# Altium PCB SD171-6.0PCB4.PcbDoc (part 9 of 11)
Units mil, origin at the board's own origin, x right, y up, seen from the top; angles counter-clockwise.
Board outline 5995 x 3921.26 mil, 6 copper layers (Top Layer, GND, Mid-Layer 1, Mid-Layer 2, VCC, Bottom Layer); 477 components, 539 nets, 2143 pads, 1050 vias.
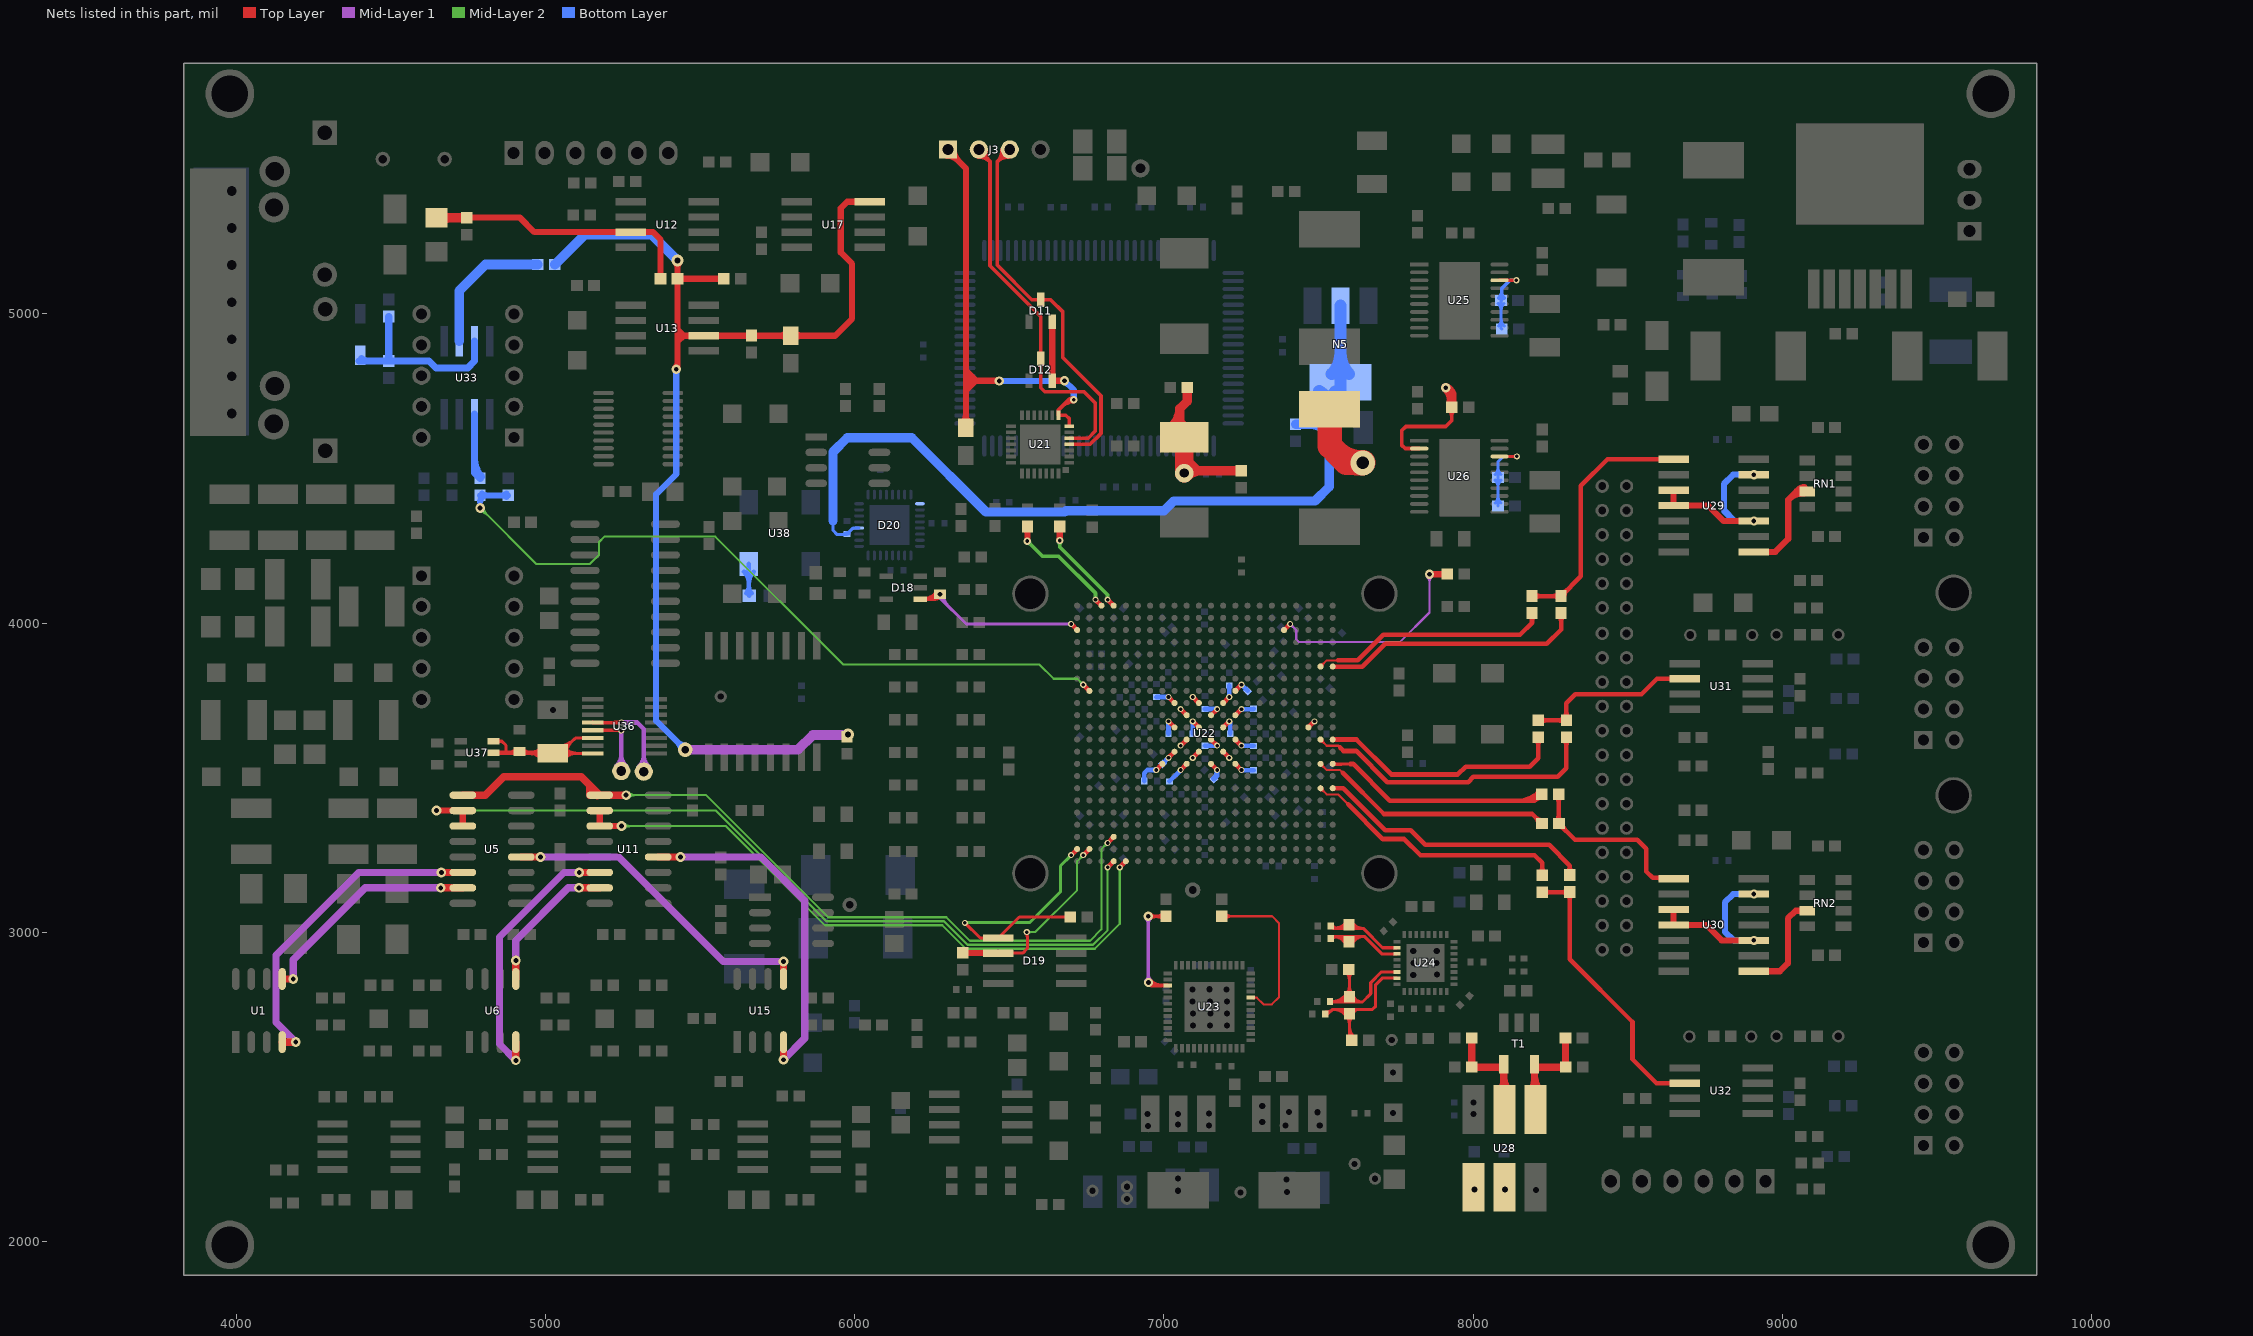
[diagram p13: the nets of this part, all layers, seen from the top]

## Via types
v1: diameter 19.68, hole 11.81, Top Layer to Bottom Layer, 521 vias
v2: diameter 50, hole 25, Top Layer to Bottom Layer, 162 vias
v3: diameter 30, hole 15, Top Layer to Bottom Layer, 100 vias
v4: diameter 39.37, hole 19.68, Top Layer to Bottom Layer, 74 vias
v5: diameter 31.5, hole 15.75, Top Layer to Bottom Layer, 44 vias
v6: diameter 40, hole 20, Top Layer to Bottom Layer, 38 vias
v7: diameter 24, hole 12, Top Layer to Bottom Layer, 33 vias
v8: diameter 47.24, hole 23.62, Top Layer to Bottom Layer, 24 vias
v9: diameter 59.06, hole 31.5, Top Layer to Bottom Layer, 10 vias
v10: diameter 60, hole 30, Top Layer to Bottom Layer, 9 vias
v11: diameter 25.98, hole 12.99, Top Layer to Bottom Layer, tented top, 9 vias
v12: diameter 23.62, hole 11.81, Top Layer to Bottom Layer, 8 vias
v13: diameter 20, hole 12, Top Layer to Bottom Layer, 6 vias
v14: diameter 50, hole 27.56, Top Layer to Bottom Layer, 4 vias
v15: diameter 51.18, hole 27.56, Top Layer to Bottom Layer, 2 vias
v16: diameter 39.37, hole 23.62, Top Layer to Bottom Layer, 2 vias
v17: diameter 80, hole 40, Top Layer to Bottom Layer, 1 vias
v18: diameter 47.24, hole 19.68, Top Layer to Bottom Layer, 1 vias
v19: diameter 47.24, hole 27.56, Top Layer to Bottom Layer, 1 vias
v20: diameter 22.05, hole 11.81, Top Layer to Bottom Layer, 1 vias

## Nets (pads, with @x,y where several pads share a name; then routed paths per layer and width w, separated by ;. In a path a pad name is that pad's centre, name@x,y a point inside that pad or via, vN(x,y) a via of type N, cw(c..) or ccw(c..) an arc to the next point about the centre after c; other vN are vias at no path point) (continued)
NetR94_1: R94.1 U22.E3 | length 1006.1
  Top Layer w15: U22.E3@7388.52,3977.26 v1(7408.21,3996.95)
  Top Layer w20: v3(7859,4158) R94.1@7917,4158 ; 7896.69,4158 ccw(c7896.69,4177.31) 7910.34,4163.66 cw(c7896.69,4177.31) 7896.69,4158 ; 7896.69,4158 cw(c7896.69,4138.69) 7910.34,4152.34 ccw(c7896.69,4138.69) 7896.69,4158
  Mid-Layer 1 w7: v1(7408.21,3996.95) 7428,3977.15 7428,3947 7437,3938 7763,3938 7859,4034 v3(7859,4158) ; v1@7408.21,3990.6 cw(c7408.21,3975.29) 7419.03,3986.12 ; v1@7408.21,3990.6 cw(c7408.21,3975.29) 7419.03,3986.12 ; v1@7408.21,3990.6 cw(c7408.21,3975.29) 7419.03,3986.12 ; v1@7414.55,3996.95 ccw(c7429.86,3996.95) 7419.03,3986.12 ; v1@7414.55,3996.95 ccw(c7429.86,3996.95) 7419.03,3986.12 ; v1@7414.55,3996.95 ccw(c7429.86,3996.95) 7419.03,3986.12 ; v3@7850.87,4149.87 cw(c7831.24,4130.24) 7859,4130.24 ; v3@7850.87,4149.87 cw(c7831.24,4130.24) 7859,4130.24 ; v3@7850.87,4149.87 cw(c7831.24,4130.24) 7859,4130.24 ; 7859,4130.24 cw(c7886.76,4130.24) v3@7867.13,4149.87 ; 7859,4130.24 cw(c7886.76,4130.24) v3@7867.13,4149.87 ; 7859,4130.24 cw(c7886.76,4130.24) v3@7867.13,4149.87
NetR96_2: R96.2 U22.A6 | length 882.4
  Top Layer w15: U22.A6@7546,3859.15 7547.15,3858 7641,3858 7716,3933 8239,3933 8285,3979 R96.2@8285,4032 ; R96.2@8277.58,4023.58 cw(c8259.65,4005.65) 8285,4005.65 cw(c8310.35,4005.65) R96.2@8292.42,4023.58
NetR97_2: R97.2 U22.A12 | length 840.5
  Top Layer w15: U22.A12@7546,3622.93 7623.07,3622.93 7736,3510 7951,3510 7976,3535 8183,3535 8211,3563 R97.2@8211,3630 ; R97.2@8203.58,3621.58 cw(c8185.65,3603.65) 8211,3603.65 cw(c8236.35,3603.65) R97.2@8218.42,3621.58
NetR98_2: R98.2 U22.A14 | length 912
  Top Layer w10: U22.A14@7546,3544.19 7547.16,3543.03 7574.32,3543.03 7575.48,3544.19 7602.81,3544.19 7603,3544 ; U22.A14@7549.42,3547.61 ccw(c7560.48,3558.67) 7560.48,3543.03
  Top Layer w15: 7603,3544 7612,3544 7731,3425 8199,3425 8221,3447 R98.2@8222,3446 ; 8144.95,3425 ccw(c8144.95,3522.05) R98.2@8213.58,3453.42 ; 8181.17,3425 ccw(c8181.17,3485.83) R98.2@8224.18,3442.82 ; 8201.37,3427.37 cw(c8221,3407.74) R98.2@8221,3435.5 ; R98.2@8203.78,3429.78 ccw(c8187.56,3446) R98.2@8210.5,3446
NetR99_2: R99.2 U22.A16 | length 940.6
  Top Layer w15: U22.A16@7546,3465.45 7580.55,3465.45 7716,3330 7798,3330 7824,3304 7846,3282 8246,3282 8313,3215 R99.2@8313,3185 ; R99.2@8305.58,3193.42 ccw(c8287.65,3211.35) 8313,3211.35 ccw(c8338.35,3211.35) R99.2@8320.42,3193.42
NetR101_2: R101.2 R103.1 T1.5 U28.5 | length 457.9
  Top Layer w23.62: R101.2@7996,2657 R103.1@7996,2563 8095,2563 T1.5@8099,2559 ; 8076.43,2563 cw(c8076.43,2534.28) T1.5@8096.75,2554.59 ; U28.5@8085.3,2485.99 ccw(c8052.21,2519.08) 8099,2519.08 ; 8099,2533.56 ccw(c8166.27,2533.56) U28.5@8118.7,2485.99 ; T1.5@8099,2571.84 T1.5@8099,2559 ; U28.5@8102,2425.98 8099,2428.98 T1.5@8099,2559
NetR102_1: R102.1 R104.2 T1.4 U28.4 | length 455.9
  Top Layer w23.62: U28.4@8185.3,2485.99 ccw(c8152.21,2519.08) 8199,2519.08 ; 8199,2533.56 ccw(c8266.27,2533.56) U28.4@8218.7,2485.99 ; T1.4@8199,2571.84 T1.4@8199,2560 ; T1.4@8201.25,2554.59 cw(c8221.57,2534.28) 8221.57,2563 ; U28.4@8202,2425.98 8199,2428.98 T1.4@8199,2560 ; R104.2@8299,2657 8299,2564 R102.1@8300,2563 8202,2563 T1.4@8199,2560
NetR105_1: pad.0@8005,2167 R105.1 U28.1 | length 133.1
  Bottom Layer w19.68: pad.0@7998.04,2173.96 ccw(c7983.65,2188.35) 8004,2188.35 ; R105.1@7998.23,2227.25 cw(c7984.31,2213.32) 8004,2213.32 cw(c8023.69,2213.32) R105.1@8009.77,2227.25 ; pad.0@8002,2170 8004,2172 R105.1@8004,2234.02 ; 8004,2193.18 ccw(c8031.18,2193.18) pad.0@8011.96,2173.96
NetR115_2: R115.2 R116.1 U33.3 Z1.2 | length 619.3
  Bottom Layer w23.62: Z1.2@4395.93,4848 R116.1@4492,4848 ; Z1.2@4403.48,4854.79 ccw(c4419.87,4871.17) 4419.87,4848 ; R115.2@4492,4992 R116.1@4492,4848 ; U33.3@4769.43,4912.22 4769.43,4847.43 4747,4825 4645,4825 4622,4848 R116.1@4492,4848
NetR118_1: R118.1 U33.6 | length 336.2
  Bottom Layer w23.62: U33.6@4769.43,4676 4769.43,4486.12 R118.1@4787.55,4468 ; 4769.43,4527.69 ccw(c4846.24,4527.69) 4791.92,4473.38 cw(c4846.24,4527.69) 4769.43,4527.69
NetR120_2: R120.2 U33.2 | length 451.9
  Bottom Layer w31.5: U33.2@4720.21,4912.22 4720.21,5075.21 4805,5160 R120.2@4974,5160
NetR121_2: R121.2 U23.44 | length 638
  Top Layer w7: R121.2@7187,3051 7350,3051 7372,3029 7372,2789 7349,2766 7322,2766 7300.2,2787.8 U23.44@7280.71,2787.8 ; R121.2@7192.3,3045.7 cw(c7205.11,3032.89) 7205.11,3051 cw(c7205.11,3069.11) R121.2@7192.3,3056.3 ; R121.2@7197.25,3040.75 cw(c7222.01,3015.99) 7222.01,3051 cw(c7222.01,3086.01) R121.2@7197.25,3061.25 ; U23.44@7290.54,2785.82 cw(c7295.32,2781.04) 7295.32,2787.8 cw(c7295.32,2794.56) U23.44@7290.54,2789.78
NetR132_2: R132.2 U22.B6 | length 838
  Top Layer w7: U22.B6@7506.63,3859.15 7526.48,3879 7563,3879 ; U22.B6@7506.63,3865.49 ccw(c7506.63,3880.8) 7517.46,3869.98 ccw(c7528.28,3859.15) U22.B6@7512.97,3859.15
  Top Layer w15: 7563,3879 7627,3879 7710,3962 8152,3962 8191,4001 R132.2@8191,4032 ; R132.2@8183.58,4023.58 cw(c8165.65,4005.65) 8191,4005.65 cw(c8216.35,4005.65) R132.2@8198.42,4023.58
NetR133_2: R133.2 U22.B12 | length 1035
  Top Layer w7: U22.B12@7506.63,3616.59 cw(c7506.63,3601.28) 7517.46,3612.1 cw(c7528.28,3622.93) U22.B12@7512.97,3622.93 ; U22.B12@7506.63,3622.93 7526.56,3603 7564,3603 7570,3597
  Top Layer w15: 7570,3597 7581,3586 7622,3586 7723,3485 7984,3485 8001,3502 8274,3502 8302,3530 R133.2@8302,3630 ; R133.2@8294.58,3621.58 cw(c8276.65,3603.65) 8302,3603.65 cw(c8327.35,3603.65) R133.2@8309.42,3621.58
NetR134_2: R134.2 U22.B14 | length 863.1
  Top Layer w7: U22.B14@7506.63,3537.85 cw(c7506.63,3522.53) 7517.46,3533.36 cw(c7528.28,3544.19) U22.B14@7512.97,3544.19 ; U22.B14@7506.63,3544.19 7526.66,3524.16 7554.01,3524.16 7554.17,3524 7570,3524 7578,3516
  Top Layer w15: 7578,3516 7712,3382 7808,3382 7817,3382 8192,3382 R134.2@8223,3351 R134.2@8221,3349 ; 8203.37,3370.63 cw(c8183.74,3351) R134.2@8211.5,3351 ; R134.2@8205.78,3368.22 ccw(c8222,3384.43) R134.2@8222,3361.5
NetR135_2: R135.2 U22.B16 | length 921.3
  Top Layer w7: U22.B16@7506.63,3459.11 cw(c7506.63,3443.79) 7517.46,3454.62 cw(c7528.28,3465.45) U22.B16@7512.97,3465.45 ; U22.B16@7506.63,3465.45 7526.66,3445.42 7554.01,3445.42 7554.43,3445 7564,3445 7596,3413
  Top Layer w15: 7596,3413 7708,3301 7778,3301 7830,3249 8199,3249 8224,3224 R135.2@8224,3184 ; R135.2@8216.58,3192.42 ccw(c8198.65,3210.35) 8224,3210.35 ccw(c8249.35,3210.35) R135.2@8231.42,3192.42
NetR136_1: pad.0@8103,2167 R136.1 U28.2 | length 122.5
  Bottom Layer w19.68: R136.1@8094.23,2227.25 cw(c8080.31,2213.32) 8100,2213.32 cw(c8119.69,2213.32) R136.1@8105.77,2227.25 ; pad.0@8098,2170 8100,2172 R136.1@8100,2234.02 ; 8100,2198 ccw(c8134,2198) pad.0@8109.96,2173.96
NetR152_2: R152.2 R153.2 U26.18 | length 451.9
  Top Layer w10: U26.18@8085.84,4538.82 8141.82,4538.82 v1(8142,4539) ; 8129.87,4538.82 ccw(c8129.87,4551.13) v1@8138.58,4542.42 ; 8130.75,4538.82 cw(c8130.75,4527.75) v1@8138.58,4535.58
  Bottom Layer w10: R152.2@8071.81,4388.19 ccw(c8049.61,4410.39) 8081,4410.39 ccw(c8112.38,4410.38) R152.2@8090.19,4388.19 ; R153.2@8071.81,4461.81 cw(c8049.62,4439.62) 8081,4439.62 cw(c8112.38,4439.62) R153.2@8090.19,4461.81 ; R153.2@8071.81,4480.19 ccw(c8049.62,4502.38) 8081,4502.38 ccw(c8112.38,4502.38) R153.2@8090.19,4480.19 ; R152.2@8081,4379 R153.2@8081,4471 8081,4522 8098,4539 v1(8142,4539) ; v1@8138.58,4535.58 ccw(c8130.31,4527.31) 8130.31,4539 ccw(c8130.31,4550.69) v1@8138.58,4542.42
NetR154_2: R154.2 R155.2 U25.18 | length 389
  Top Layer w12: U25.18@8085.84,5108.82 8139.82,5108.82 v1(8140,5109)
  Bottom Layer w10: R154.2@8081.65,5034.08 cw(c8059.46,5011.89) 8090.84,5011.89 cw(c8122.23,5011.89) R154.2@8100.03,5034.08 ; R155.2@8082.65,4960.47 ccw(c8062.87,4980.25) 8090.84,4980.25 ; 8090.84,4985.07 ccw(c8125.64,4985.07) R155.2@8101.03,4960.47 ; R154.2@8090.84,5043.28 8090.84,4953.28 R155.2@8092.84,4951.28
  Bottom Layer w12: R154.2@8083.36,5051.76 ccw(c8060.08,5075.04) 8093,5075.04 ; R154.2@8090.84,5043.28 8093,5045.43 8093,5082 8120,5109 v1(8140,5109) ; 8093,5069.45 ccw(c8118.02,5069.45) R154.2@8100.33,5051.76
NetR156_1: R156.1 U38.3 | length 234.6
  Bottom Layer w15: U38.3@5641.42,4165.58 cw(c5603.82,4127.98) 5657,4127.98 cw(c5710.18,4127.98) U38.3@5672.58,4165.58 ; R156.1@5648.16,4096.84 ccw(c5626.82,4118.18) 5657,4118.18 ccw(c5687.18,4118.18) R156.1@5665.84,4096.84 ; U38.3@5657,4191 5657,4089.5 R156.1@5658.5,4088
NetRN1_3: RN1.3 U29.8 | length 519.7
  Top Layer w20: U29.8@8908.84,4230 8978,4230 9020,4272 9020,4399 ; 9019.43,4398.43 cw(c9071.5,4346.37) RN1.3@9071.5,4420 ; 9034.75,4413.75 cw(c9056.95,4391.55) RN1.3@9069.17,4420.47 ; 9053.58,4432.58 cw(c9071.5,4414.65) RN1.3@9071.5,4440 ; 9053.66,4432.66 cw(c9071.39,4414.93) RN1.3@9071.64,4440 ; RN1.3@9071.44,4420 ccw(c9070.71,4348.3) 9020,4399 ; RN1.3@9081,4426 9047,4426 9020,4399
NetRN2_3: RN2.3 U30.8 | length 338.3
  Top Layer w20: U30.8@8908.84,2873 8993,2873 9019,2899 9019,3044 9044,3069 RN2.3@9081,3069
NetU1_4: U1.4 U5.14 | length 1067
  Top Layer w23.62: U1.4@4147,2644 v5(4191,2644) ; v5(4662,3193) U5.14@4731.51,3193
  Mid-Layer 1 w23.62: v5(4191,2644) 4127,2708 4127,2925 4395,3193 v5(4662,3193)
NetU1_5: U1.5 U5.15 | length 743.1
  Top Layer w23.62: U1.5@4147,2848.25 4182.75,2848.25 v5(4183,2848) ; v5(4660,3143) U5.15@4731.51,3143
  Mid-Layer 1 w23.62: v5(4183,2848) 4183,2910 4416,3143 v5(4660,3143)
NetU5_4: U5.4 U15.5 | length 1045.3
  Top Layer w23.62: U5.4@4920.49,3243 v5(4983,3243) ; U15.5@5769,2848.25 v5(5769,2905)
  Mid-Layer 1 w23.62: v5(4983,3243) 5236,3243 5574,2905 v5(5769,2905)
NetU6_4: U6.4 U11.14 | length 891
  Top Layer w23.62: v5(4903,2585) U6.4@4903,2644 ; v5(5108,3193) U11.14@5174.51,3193
  Mid-Layer 1 w23.62: v5(4903,2585) 4850,2638 4850,2984 5059,3193 v5(5108,3193)
NetU6_5: U6.5 U11.15 | length 466.7
  Top Layer w23.62: U6.5@4903,2848.25 v5(4903,2908) ; v5(5107,3143) U11.15@5174.51,3143
  Mid-Layer 1 w23.62: v5(4903,2908) 4903,2973 5073,3143 v5(5107,3143)
NetU11_4: U11.4 U15.4 | length 1132.9
  Top Layer w23.62: U11.4@5363.49,3243 v5(5436,3243) ; v5(5769,2587) U15.4@5769,2644
  Mid-Layer 1 w23.62: v5(5436,3243) 5696,3243 5838,3101 5838,2656 v5(5769,2587)
NetU29_3: U29.3 U29.4 U29.10 U29.13 | length 636.7
  Top Layer w20: U29.3@8649,4430 U29.4@8649,4380 8761,4380 8811,4330 v3(8908.84,4330)
  Bottom Layer w20: v3(8908.84,4330) 8846,4330 8812,4364 8812,4450 8842,4480 v3(8908.84,4480)
NetU30_3: U30.3 U30.4 U30.10 U30.13 | length 636
  Top Layer w20: U30.3@8649,3073 U30.4@8649,3023 8754,3023 8804,2973 v3(8908.84,2973)
  Bottom Layer w20: v3(8908.84,2973) 8843,2973 8815,3001 8815,3096 8842,3123 v3(8908.84,3123)
NOP1: pad.0@5317,3519 U36.4 | length 395.5
  Top Layer w12: U36.4@5152,3678 5152.34,3677.66 5222.67,3677.66 5223.01,3678 v1(5245,3678)
  Mid-Layer 1 w15: v1(5245,3678) 5296,3678 5317,3657 pad.0@5317,3519 ; pad.0@5301.42,3534.58 ccw(c5263.82,3572.18) 5317,3572.18 ccw(c5370.18,3572.18) pad.0@5332.58,3534.58
NOP2: pad.0@5244,3521 U36.5 | length 310.9
  Top Layer w12: U36.5@5152,3653 v1@5245,3653
  Top Layer w15: v1(5244,3652) 5246,3652 v1@5245,3653
  Mid-Layer 1 w15: pad.0@5228.42,3536.58 ccw(c5190.82,3574.18) 5244,3574.18 ccw(c5297.18,3574.18) pad.0@5259.58,3536.58 ; pad.0@5244,3521 v1(5244,3652)
OPRX1: R99.1 R135.1 U32.6 | length 1034.5
  Top Layer w15: R135.1@8224,3129 8312,3129 R99.1@8313,3130 8313,2912 8516,2709 8516,2589 8593.69,2511.31 U32.6@8684.38,2511.31 ; R135.1@8231.42,3121.58 cw(c8249.35,3103.65) 8249.35,3129 cw(c8249.35,3154.35) R135.1@8231.42,3136.42 ; R99.1@8305.58,3136.42 cw(c8287.65,3154.35) 8287.65,3129 cw(c8287.65,3103.65) 8305.58,3121.58 cw(c8287.65,3103.65) 8313,3103.65 cw(c8338.35,3103.65) R99.1@8320.42,3121.58
OPRX2: R97.1 R133.1 U31.6 | length 680.7
  Top Layer w15: R97.1@8211,3685 R133.1@8302,3685 8302,3740 8331,3769 8545,3769 8595.31,3819.31 U31.6@8684.38,3819.31 ; R97.1@8218.42,3677.58 cw(c8236.35,3659.65) 8236.35,3685 cw(c8236.35,3710.35) R97.1@8218.42,3692.42 ; R133.1@8294.58,3677.58 ccw(c8276.65,3659.65) 8276.65,3685 ccw(c8276.65,3710.35) R133.1@8294.58,3692.42 ; R133.1@8294.58,3693.42 ccw(c8276.65,3711.35) 8302,3711.35 ccw(c8327.35,3711.35) R133.1@8309.42,3693.42
OPRXTAP4: U22.C11 | length 27.8
  Top Layer w15: U22.C11@7467.26,3662.3 v1(7486.95,3681.99)
OPTX1: R98.1 R134.1 U30.1 | length 749.6
  Top Layer w15: R134.1@8269.58,3358.42 ccw(c8251.65,3376.35) 8277,3376.35 ccw(c8302.35,3376.35) R134.1@8284.42,3358.42 ; R98.1@8269.58,3438.58 cw(c8251.65,3420.65) 8277,3420.65 cw(c8302.35,3420.65) R98.1@8284.42,3438.58 ; R98.1@8277,3446 8277,3352 R134.1@8278,3351 8330,3299 8531,3299 8561,3269 8561,3196 8581,3176 8646,3176 U30.1@8649,3173 U30.1@8680,3173 ; R134.1@8279,3340.5 cw(c8279,3317.57) R134.1@8295.22,3333.78 ; R134.1@8289.5,3351 ccw(c8317.26,3351) 8297.63,3331.37 ; 8593.95,3176 cw(c8593.95,3155.35) U30.1@8608.55,3169.95
OPTX2: R96.1 R132.1 U29.1 | length 932.6
  Top Layer w15: R132.1@8191,4087 R96.1@8285,4087 8349,4151 8349,4444 8435,4530 U29.1@8649,4530 ; R132.1@8198.42,4079.58 cw(c8216.35,4061.65) 8216.35,4087 cw(c8216.35,4112.35) R132.1@8198.42,4094.42 ; R96.1@8277.58,4079.58 ccw(c8259.65,4061.65) 8259.65,4087 ccw(c8259.65,4112.35) R96.1@8277.58,4094.42 ; R96.1@8285,4098.5 ccw(c8285,4126.26) 8304.63,4106.63 ; R96.1@8295.5,4088 cw(c8318.43,4088) R96.1@8302.22,4104.22
OR: R85.1 U23.15 | length 546
  Top Layer w12: v3@6947.88,2834.88 ccw(c6966.41,2853.41) 6966.41,2827.2 ; v3(6949.16,3051) R85.1@7007,3051 ; v3(6950,2837) 6959.8,2827.2 U23.15@7012.11,2827.2 ; v3@6955.52,3044.64 cw(c6970.89,3029.27) 6970.89,3051 cw(c6970.89,3072.73) v3@6955.52,3057.36 ; v3@6956.36,2843.36 ccw(c6995.38,2882.38) 6995.38,2827.2 ; R85.1@6998.51,3042.51 ccw(c6978.03,3022.03) 6978.03,3051 ccw(c6978.03,3079.97) R85.1@6998.51,3059.49
  Mid-Layer 1 w12: v3@6942.79,3044.64 cw(c6927.43,3029.27) 6949.16,3029.27 cw(c6970.89,3029.27) v3@6955.52,3044.64 ; v3@6943.64,2843.36 ccw(c6930.31,2856.69) 6949.16,2856.69 ; v3@6949.16,2840.84 v3(6949.16,3051) ; 6949.16,2860.76 ccw(c6973.76,2860.76) v3@6956.36,2843.36
OUT0_N: C62.2 R86.2 R90.1 U24.23 | length 684
  Top Layer w10: C62.2@7521.7,2734.98 7530.98,2734.98 7546,2750 ; C62.2@7522.02,2740.97 ccw(c7524.05,2771.95) 7546,2750 ; 7566.77,2750 cw(c7566.77,2710.49) R86.2@7597.65,2735.13 ; R86.2@7589.84,2728.89 ccw(c7546,2693.93) 7546,2750 ; R86.2@7590.81,2725.81 cw(c7568.62,2703.62) 7600,2703.62 cw(c7631.38,2703.62) R86.2@7609.19,2725.81 ; 7600,2674.14 ccw(c7631.14,2674.14) R90.1@7609.12,2652.12 ; 7600,2698.28 ccw(c7655.28,2698.28) R90.1@7616.19,2659.19 ; R86.2@7600,2736 7600,2650 R90.1@7601,2649 ; R86.2@7602.98,2736.67 cw(c7617.85,2735.05) R86.2@7617.85,2750 ; R86.2@7612.92,2735.59 cw(c7629,2733.83) 7629,2750 ; U24.23@7754.44,2850.94 7706,2850.94 7685,2829.94 7685,2760 7675,2750 7629,2750 ; 7546,2750 7629,2750
OUT0_P: C63.2 R86.1 R89.1 U24.22 | length 711.4
  Top Layer w10: C63.2@7536.7,2774.98 C63.2@7537.68,2774 ; C63.2@7541.23,2770.45 cw(c7549.81,2761.87) 7549.81,2774 ; C63.2@7541.23,2777.52 ccw(c7549.73,2786.01) 7549.73,2774 ; 7559.18,2774 ccw(c7559.18,2824.34) R86.1@7597.7,2791.93 ; 7580.67,2774 ccw(c7580.67,2806.27) R86.1@7605.36,2785.49 ; R89.1@7589.81,2869.81 cw(c7565.2,2845.2) 7600,2845.2 ; R86.1@7590.05,2798.37 cw(c7537.7,2842.42) C63.2@7537.7,2774 ; R86.1@7590.81,2801.19 ccw(c7568.62,2823.38) 7600,2823.38 ccw(c7631.38,2823.38) R86.1@7609.19,2801.19 ; R86.1@7593.4,2787.67 ccw(c7612.72,2794.49) R86.1@7612.72,2774 ; R89.1@7598,2879 7600,2877 R86.1@7600,2791 ; 7600,2850.03 cw(c7627.97,2850.03) R89.1@7608.19,2869.81 ; R86.1@7602.83,2791 ccw(c7626.86,2799.49) 7626.86,2774 ; R86.1@7612.26,2794.33 ccw(c7641,2804.48) 7641,2774 ; U24.22@7754.44,2870.64 7703.07,2870.64 7669,2836.57 7669,2800.63 7642.37,2774 7641,2774 ; C63.2@7537.7,2774 7641,2774
OUT1_N: C60.2 R88.2 U24.19 | length 487.7
  Top Layer w10: C60.2@7539.62,2979.39 C60.2@7546.23,2986 ; C60.2@7543.15,2976.86 cw(c7565.23,2954.79) 7565.23,2986 ; 7564.42,2986 cw(c7564.42,2948.04) R88.2@7596.47,2968.39 ; R88.2@7582.62,2986 cw(c7582.62,2959.6) R88.2@7604.91,2973.75 ; R88.2@7588.03,2963.03 ccw(c7546.23,2936.48) C60.2@7546.23,2986 ; R88.2@7592.86,2973.37 cw(c7614.21,2961.65) R88.2@7614.21,2986 ; R88.2@7601.63,2968.56 cw(c7631.1,2952.38) 7631.1,2986 ; R88.2@7610.4,2963.74 cw(c7648,2943.11) 7648,2986 ; U24.19@7754.44,2929.64 7704.36,2929.64 7648,2986 ; C60.2@7546.23,2986 7648,2986
OUT1_P: C61.2 R88.1 U24.18 | length 420.6
  Top Layer w10: C61.2@7539.6,3019.61 C61.2@7547.32,3011.88 ; C61.2@7543.13,3022.14 ccw(c7567.9,3046.91) 7567.9,3011.88 ; 7568.75,3011.88 ccw(c7568.75,3048.35) R88.1@7596.7,3024.93 ; R88.1@7589.04,3031.35 cw(c7547.32,3066.3) C61.2@7547.32,3011.88 ; R88.1@7601.48,3024.69 ccw(c7625.78,3041.33) 7625.78,3011.88 ; R88.1@7609.73,3030.34 ccw(c7644.74,3054.32) 7644.74,3011.88 ; U24.18@7754.44,2949.34 7707.29,2949.34 7644.74,3011.88 ; C61.2@7547.32,3011.88 7621,3011.88 7644.74,3011.88
POWER_5V_CTRL: D20.1
PVAMPIN+: C14.2 R32.2 R34.2 U12.3 | length 1032.5
  Top Layer w20: R32.2@4744.09,5310.91 4745.19,5312 4916,5312 4963,5265 U12.3@5275.09,5265 ; R32.2@4749.75,5306.25 cw(c4763.64,5292.36) 4763.64,5312 ; R32.2@4749.75,5317.56 ccw(c4763.18,5330.99) 4763.18,5312 ; U12.3@5275.4,5264.69 5347.31,5264.69 5371,5241 R34.2@5371,5114 ; 5371,5133.31 ccw(c5390.31,5133.31) 5376.66,5119.66 cw(c5390.31,5133.31) 5371,5133.31 ; 5371,5133.31 cw(c5351.69,5133.31) 5365.34,5119.66 ccw(c5351.69,5133.31) 5371,5133.31
  Top Layer w31.5: C14.2@4645.67,5311.02 4645.79,5310.91 R32.2@4744.09,5310.91 ; C14.2@4660.74,5299.89 cw(c4687.34,5273.29) 4687.34,5310.91 ; C14.2@4660.74,5322.16 ccw(c4687.91,5349.33) 4687.91,5310.91
PVBH: R118.2 R119.1 U22.AA8 | length 2631.1
  Top Layer w15: v1(6738.91,3800.1) U22.AA8@6758.6,3780.41
  Mid-Layer 2 w7: v5@4787.55,4360.2 cw(c4787.55,4330.64) 4808.46,4351.54 cw(c4829.36,4372.45) v5@4799.8,4372.45 ; v5(4787.55,4372.45) 4969,4191 5142,4191 5172,4221 5172,4262 5189.34,4279.34 5548.66,4279.34 5962,3866 6596.62,3866 6643.18,3819.44 6719.57,3819.44 v1(6738.91,3800.1) ; 6728.08,3810.92 cw(c6717.26,3800.1) v1@6732.57,3800.1 ; 6728.08,3810.92 ccw(c6738.91,3821.75) v1@6738.91,3806.44 ; 6728.08,3810.92 cw(c6717.26,3800.1) v1@6732.57,3800.1 ; 6728.08,3810.92 ccw(c6738.91,3821.75) v1@6738.91,3806.44 ; 6728.08,3810.92 ccw(c6738.91,3821.75) v1@6738.91,3806.44 ; 6728.08,3810.92 cw(c6717.26,3800.1) v1@6732.57,3800.1
  Bottom Layer w19.68: 4787.55,4392.31 cw(c4807.24,4392.31) R118.2@4793.32,4406.23 ; R118.2@4787.55,4413 R119.1@4878.32,4413 ; R118.2@4793.32,4407.23 cw(c4807.24,4393.31) 4807.24,4413 cw(c4807.24,4432.69) R118.2@4793.32,4418.77 ; 4858.63,4413 ccw(c4858.63,4432.69) 4872.55,4418.77 cw(c4858.63,4432.69) 4858.63,4413 ; 4858.63,4413 cw(c4858.63,4393.31) 4872.55,4407.23 ccw(c4858.63,4393.31) 4858.63,4413
R1.25V: C220.1 C222.1 U36.6 U36.8 U37.5 U37.6 | length 972.7
  Top Layer w10: U37.6@4831.15,3617.4 4857.6,3617.4 4871,3604 4871,3580 ; U37.6@4844.13,3613.28 cw(c4854.07,3603.33) 4854.07,3617.4 cw(c4854.07,3631.47) U37.6@4844.13,3621.52 ; C220.1@5022,3580 C220.1@5023,3579 ; C220.1@5042.69,3593.53 ccw(c5042.69,3639.02) 5074.85,3606.85 ; C220.1@5042.69,3603.53 ccw(c5042.69,3673.16) 5091.92,3623.92 ; C220.1@5052.96,3568.73 cw(c5075.34,3546.34) 5075.34,3578 ; C220.1@5052.96,3589.27 ccw(c5080.17,3616.49) 5080.17,3578 ; C220.1@5060.03,3561.66 cw(c5099.49,3522.2) 5099.49,3578 ; C220.1@5060.03,3596.34 ccw(c5104.31,3640.63) 5104.31,3578 ; C220.1@5067.21,3579 cw(c5116.01,3579) 5081.5,3613.5 ; U36.8@5152,3578 5024,3578 C220.1@5023,3579 ; U36.6@5152,3628 5096,3628 5047,3579 C220.1@5023,3579
  Top Layer w15: U37.5@4831.15,3580 4871,3580 C220.1@5022,3580 ; 4882.55,3580 ccw(c4882.55,3611.76) C222.1@4905.01,3589.3 ; C222.1@4924.99,3589.3 ccw(c4947.45,3611.76) 4947.45,3580 ; 4947.72,3580 cw(c4947.72,3523.41) C220.1@4987.74,3563.42 ; 4952.55,3580 ccw(c4952.55,3629.77) C220.1@4987.74,3594.58
REF2V5: C37.2 R34.1 R41.1 R43.1 R120.1 R146.1 U13.6 U17.8 | length 4677.8
  Top Layer w20: v3(5422,4821) 5426,4825 5426,4909.39 ; v4(5426,5173) R34.1@5426,5114 ; R41.1@5575.9,5110 R41.1@5576,5110 ; R41.1@5576,5114 R34.1@5426,5114 ; C37.2@5792,4930 C37.2@5791.69,4929.69 ; U17.8@6047.62,5363.12 5975.12,5363.12 5954,5342 5954,5199 5991,5162 5991,4985 5935.69,4929.69 C37.2@5791.69,4929.69 ; 5426,4909.39 5446.31,4929.69 ; 5426,4909.39 5426,4950 ; 5426,4950 R34.1@5426,5114 ; 5426,4950 5446.31,4929.69 ; 5426,5094.69 ccw(c5406.69,5094.69) 5420.34,5108.34 cw(c5406.69,5094.69) 5426,5094.69 ; 5426,5094.69 cw(c5445.31,5094.69) 5431.66,5108.34 ccw(c5445.31,5094.69) 5426,5094.69 ; 5426,5133.31 ccw(c5445.31,5133.31) 5431.66,5119.66 cw(c5445.31,5133.31) 5426,5133.31 ; 5426,5133.31 cw(c5406.69,5133.31) 5420.34,5119.66 ccw(c5406.69,5133.31) 5426,5133.31 ; 5426,5149.62 cw(c5449.38,5149.62) 5432.85,5166.15 ccw(c5449.38,5149.62) 5426,5149.62 ; 5426,5149.62 ccw(c5402.62,5149.62) 5419.15,5166.15 cw(c5402.62,5149.62) 5426,5149.62 ; 5446.31,4929.69 U13.6@5511.62,4929.69 C37.2@5791.69,4929.69 ; 5446.31,5114 ccw(c5446.31,5094.69) 5432.66,5108.34 cw(c5446.31,5094.69) 5446.31,5114 ; 5446.31,5114 cw(c5446.31,5133.31) 5432.66,5119.66 ccw(c5446.31,5133.31) 5446.31,5114 ; 5555.69,5114 ccw(c5555.69,5133.31) 5569.34,5119.66 cw(c5555.69,5133.31) 5555.69,5114 ; 5555.69,5114 cw(c5555.69,5094.69) 5569.34,5108.34 ccw(c5555.69,5094.69) 5555.69,5114 ; v3@5418.46,4824.54 ccw(c5400.27,4842.73) 5426,4842.73 cw(c5400.27,4842.73) v3@5418.46,4824.54 ; 5644.95,4929.69 ccw(c5644.95,4950.05) 5659.34,4935.66 cw(c5644.95,4950.05) 5644.95,4929.69 ; 5646.43,4929.69 cw(c5646.43,4911.43) 5659.34,4924.34 ccw(c5646.43,4911.43) 5646.43,4929.69 ; R43.1@5670.66,4924.34 cw(c5683.57,4911.43) 5683.57,4929.69 ccw(c5683.57,4911.43) R43.1@5670.66,4924.34 ; R43.1@5670.66,4935.66 ccw(c5685.05,4950.05) 5685.05,4929.69 cw(c5685.05,4950.05) R43.1@5670.66,4935.66 ; 5755.05,4929.69 ccw(c5755.05,4966.95) 5781.39,4940.61 cw(c5755.05,4966.95) 5755.05,4929.69 ; 5756.53,4929.69 cw(c5756.53,4894.53) 5781.39,4919.39 ccw(c5756.53,4894.53) 5756.53,4929.69 ; C37.2@5802.61,4919.39 cw(c5827.47,4894.53) 5827.47,4929.69 ccw(c5827.47,4894.53) C37.2@5802.61,4919.39 ; C37.2@5802.61,4940.61 ccw(c5828.95,4966.95) 5828.95,4929.69 cw(c5828.95,4966.95) C37.2@5802.61,4940.61
  Mid-Layer 1 w31.5: v8(5451,3590) 5816,3590 5864,3638 5976,3638 5977,3637 5978,3638 v4(5978,3639)
  Bottom Layer w20: v3(5422,4821) 5422,4482 5357,4417 5357,3684 v8(5451,3590) ; v8@5437.38,3590 ccw(c5404.49,3590) 5427.75,3613.25 ccw(c5451,3636.51) v8@5451,3603.62
  Bottom Layer w31.5: R120.1@5029,5160 5125,5256 5343,5256 v4(5426,5173)
SHT_DATA: D19.1 R138.2 U22.AB21 | length 929.7
  Top Layer w10: v1(6356,3030) 6404.88,2981.12 D19.1@6464.4,2981.12 6532.28,3049 R138.2@6697,3049
  Top Layer w15: v1(6699.54,3248.91) U22.AB21@6719.23,3268.6
  Mid-Layer 2 w10: v1@6357,3031 6566,3031 6665,3130 6665,3214.37 v1(6699.54,3248.91) ; v1@6359.42,3026.58 cw(c6370.1,3015.89) 6370.1,3031 ; v1@6694.7,3248.91 cw(c6683.01,3248.91) 6691.28,3240.65 cw(c6699.54,3232.38) v1@6699.54,3244.07
SHT_SCK: D19.2 R137.2 U22.AA21 | length 683.8
  Top Layer w10: D19.2@6464.4,2931.91 6542.91,2931.91 6558,2947 6558,2983.48 ccw(c6539.48,2983.48) v1@6552.58,2996.58
  Top Layer w15: v1(6738.91,3248.91) U22.AA21@6758.6,3268.6
  Top Layer w20: R137.2@6350.09,2931.91 D19.2@6464.4,2931.91 D19.2@6463.31,2933
  Mid-Layer 2 w7: v1(6556,3000) 6584,3000 6719,3135 6719,3229 v1(6738.91,3248.91) ; v1@6560.48,2995.52 cw(c6571.31,2984.69) 6571.31,3000 cw(c6571.31,3015.31) v1@6560.48,3004.48 ; v1@6732.57,3248.91 cw(c6717.26,3248.91) 6728.08,3238.08 cw(c6738.91,3227.26) v1@6738.91,3242.57
SWAB1: U5.10 U5.11 U22.W22 | length 2878.8
  Top Layer w15: v1(6817.65,3209.54) U22.W22@6837.34,3229.23
  Top Layer w20: v5(4646,3393) U5.10@4731.51,3393 U5.11@4731.51,3343
  Mid-Layer 2 w7: v5(4646,3393) 5550.38,3393 5908.38,3035 6288.38,3035 6364.38,2959 6770.62,2959 6817.65,3006.04 v1(6817.65,3209.54) ; 4675.57,3393 cw(c4675.57,3422.57) 4654.66,3401.66 ccw(c4675.57,3422.57) 4675.57,3393 ; 4675.57,3393 ccw(c4675.57,3363.43) 4654.66,3384.34 cw(c4675.57,3363.43) 4675.57,3393 ; 6817.65,3194.23 ccw(c6802.34,3194.23) 6813.17,3205.06 cw(c6802.34,3194.23) 6817.65,3194.23 ; 6817.65,3194.23 cw(c6832.96,3194.23) 6822.14,3205.06 ccw(c6832.96,3194.23) 6817.65,3194.23
SWAB2: U11.10 U11.11 U22.V22 | length 2281.9
  Top Layer w15: v1(6857.02,3209.54) U22.V22@6876.71,3229.23
  Top Layer w20: U11.10@5174.51,3393 U11.11@5174.51,3343 v5(5245,3343)
  Mid-Layer 2 w7: v5(5245,3343) 5582,3343 5903,3022 6283,3022 6359,2946 6776,2946 6857.02,3027.02 v1(6857.02,3209.54) ; 5274.57,3343 cw(c5274.57,3372.57) 5253.66,3351.66 ccw(c5274.57,3372.57) 5274.57,3343 ; 5274.57,3343 ccw(c5274.57,3313.43) 5253.66,3334.34 cw(c5274.57,3313.43) 5274.57,3343 ; 6857.02,3194.23 ccw(c6841.71,3194.23) 6852.54,3205.06 cw(c6841.71,3194.23) 6857.02,3194.23 ; 6857.02,3194.23 cw(c6872.33,3194.23) 6861.51,3205.06 ccw(c6872.33,3194.23) 6857.02,3194.23
SWC: U5.9 U11.9 U22.W20 | length 2901.8
  Top Layer w15: v1(6817.65,3288.28) U22.W20@6837.34,3307.97
  Top Layer w23.62: U5.9@4731.51,3443 4804,3443 4864,3503 5114.51,3503 5142,3475.51 ; U11.9@5143.02,3443 ccw(c5125.2,3458.72) 5142,3475.51 ; 5160.74,3456.78 cw(c5146.55,3442.59) U11.9@5166.48,3440.25 ; v5(5260,3443) U11.9@5174.51,3443 ; 5142,3475.51 U11.9@5174.51,3443 ; 5142,3475.51 5142,3443 U11.9@5174.51,3443
  Mid-Layer 2 w7: v5(5260,3443) 5518.77,3443 5913.77,3048 6296,3048 6372,2972 6761,2972 6797.62,3008.62 6797.62,3268.25 v1(6817.65,3288.28) ; 5289.57,3443 cw(c5289.57,3472.57) 5268.66,3451.66 ccw(c5289.57,3472.57) 5289.57,3443 ; 5289.57,3443 ccw(c5289.57,3413.43) 5268.66,3434.34 cw(c5289.57,3413.43) 5289.57,3443 ; 6806.82,3277.45 ccw(c6796,3288.28) 6811.31,3288.28 cw(c6796,3288.28) 6806.82,3277.45 ; 6806.82,3277.45 cw(c6817.65,3266.63) 6817.65,3281.94 ccw(c6817.65,3266.63) 6806.82,3277.45
SYS_RST#: D18.1 R149.1 U22.AB3 | length 809.4
  Top Layer w10: D18.1@6227.42,4073.62 cw(c6234.01,4067.03) 6234.01,4076.35 cw(c6234.01,4085.66) D18.1@6227.42,4079.07 ; 6233.82,4076.35 ccw(c6233.82,4124.67) R149.1@6270.32,4093 ; 6255.73,4076.35 ccw(c6255.73,4105.65) R149.1@6277.87,4086.45 ; R149.1@6260.69,4078.69 ccw(c6255.45,4083.93) R149.1@6261.78,4087.79 ; R149.1@6261.24,4079.24 cw(c6270.31,4070.17) R149.1@6270.31,4083 ; R149.1@6262.76,4099.55 cw(c6211.9,4143.68) D18.1@6211.9,4076.35 6258.35,4076.35 v5(6275,4093)
  Top Layer w15: v1(6699.54,3996.95) U22.AB3@6719.23,3977.26
  Mid-Layer 1 w10: v5(6275,4093) 6275,4081.95 6360,3996.95 v1(6699.54,3996.95) ; v5@6275.75,4093 ccw(c6304.24,4093) 6284.09,4072.85 ; v5@6285.75,4093 ccw(c6338.38,4093) 6301.16,4055.78 ; v1@6696.12,3993.52 ccw(c6687.85,3985.26) 6687.85,3996.95 ccw(c6687.85,4008.64) v1@6696.12,4000.37
UD+: D11.3 J3.3 U21.4 | length 1481.1
  Top Layer w12: 6460.5,5492.5 cw(c6499.11,5453.89) J3.3@6500.43,5508.48 ; 6461.54,5493.54 ccw(c6423.09,5532) J3.3@6477.47,5532 ; J3.3@6475.49,5530.06 cw(c6425.93,5528.08) 6461,5493 ; J3.3@6498.06,5507.49 ccw(c6496.08,5457.93) 6461,5493 ; J3.3@6499,5531 6461,5493 ; U21.4@6694,4578.06 6760.51,4578.06 6796,4613.54 6796,4735 6673,4858 6673,5006 6633,5046 D11.3@6601,5046 6572.46,5046 6461,5157.46 6461,5493 ; 6586.97,5046 ccw(c6586.97,5060.03) 6596.89,5050.11 cw(c6586.97,5060.03) 6586.97,5046 ; 6586.97,5046 cw(c6586.97,5031.97) 6596.89,5041.89 ccw(c6586.97,5031.97) 6586.97,5046 ; 6615.03,5046 ccw(c6615.03,5031.97) 6605.11,5041.89 cw(c6615.03,5031.97) 6615.03,5046 ; 6615.03,5046 cw(c6615.03,5060.03) 6605.11,5050.11 ccw(c6615.03,5060.03) 6615.03,5046
UD-: D12.3 J3.2 U21.5 | length 1481.2
  Top Layer w12: J3.2@6399,5531 6437,5493 ; J3.2@6399.94,5507.49 cw(c6401.92,5457.93) 6437,5493 ; J3.2@6401.25,5508.47 cw(c6401.76,5460.77) 6435.5,5494.5 cw(c6463.66,5522.66) J3.2@6424.27,5528.53 ; J3.2@6422.51,5530.06 ccw(c6472.07,5528.08) 6437,5493 ; U21.5@6694,4597.74 6754.74,4597.74 6778,4621 6778,4711.54 6741.6,4747.94 6614.06,4747.94 6601,4761 D12.3@6601,4854.43 6601,4992 6437,5156 6437,5493 ; 6601,4828.59 ccw(c6586.97,4828.59) 6596.89,4838.51 cw(c6586.97,4828.59) 6601,4828.59 ; 6601,4828.59 cw(c6615.03,4828.59) 6605.11,4838.51 ccw(c6615.03,4828.59) 6601,4828.59 ; 6601,4880.27 ccw(c6615.03,4880.27) 6605.11,4870.35 cw(c6615.03,4880.27) 6601,4880.27 ; 6601,4880.27 cw(c6586.97,4880.27) 6596.89,4870.35 ccw(c6586.97,4880.27) 6601,4880.27
  Top Layer w15: D12.3@6601,4854.43 D12.3@6601.51,4854.94
URXD: R73.1 U22.Y1 | length 514.8
  Top Layer w15: v1(6778.28,4075.69) U22.Y1@6797.97,4056
  Top Layer w20: v7(6558,4265) R73.1@6558,4312 ; 6558,4291.69 ccw(c6538.69,4291.69) 6552.34,4305.34 cw(c6538.69,4291.69) 6558,4291.69 ; 6558,4291.69 cw(c6577.31,4291.69) 6563.66,4305.34 ccw(c6577.31,4291.69) 6558,4291.69
  Mid-Layer 2 w12: v7(6558,4265) 6607,4216 6659,4216 6778.28,4096.72 v1(6778.28,4075.69) ; v7@6558,4259 cw(c6558,4244.51) 6568.24,4254.76 ; v7@6558,4259 cw(c6558,4244.51) 6568.24,4254.76 ; v7@6558,4259 cw(c6558,4244.51) 6568.24,4254.76 ; v7@6564,4265 ccw(c6578.49,4265) 6568.24,4254.76 ; v7@6564,4265 ccw(c6578.49,4265) 6568.24,4254.76 ; v7@6564,4265 ccw(c6578.49,4265) 6568.24,4254.76
USB5V: C46.1 D11.2 D12.2 J3.1 U21.7 U21.8 | length 2342.2
  Top Layer w12: 6681.99,4709.03 ccw(c6673.12,4742.14) v7@6702.8,4725 ; U21.7@6694,4637.11 6694,4661 6682.46,4672.54 U21.8@6658.57,4672.54 6658.57,4689.57 6691,4722 v7(6708,4722) ; 6668.74,4699.74 cw(c6708,4660.47) v7@6708,4716 ; 6668.74,4699.74 cw(c6708,4660.47) v7@6708,4716 ; 6668.74,4699.74 cw(c6708,4660.47) v7@6708,4716 ; 6689.22,4720.22 cw(c6708,4701.44) v7@6708,4728 ; 6689.22,4720.22 cw(c6708,4701.44) v7@6708,4728 ; 6689.22,4720.22 cw(c6708,4701.44) v7@6708,4728 ; 6693.51,4722 cw(c6693.51,4707.51) 6703.76,4717.76 ccw(c6693.51,4707.51) 6693.51,4722 ; 6693.51,4722 ccw(c6693.51,4736.49) 6703.76,4726.24 cw(c6693.51,4736.49) 6693.51,4722 ; U21.8@6658.47,4682.39 cw(c6675.58,4682.39) 6663.48,4694.48 ccw(c6675.58,4682.39) U21.8@6658.47,4682.39
  Top Layer w20: J3.1@6299,5511.47 cw(c6299,5464.33) 6332.34,5497.66 cw(c6365.67,5531) J3.1@6318.53,5531 ; J3.1@6299,5531 6359,5471 6359,4817.57 ; J3.1@6301,5512.47 cw(c6301,5472.57) 6329.21,5500.79 ; J3.1@6320.53,5532 ccw(c6374.91,5532) 6336.46,5493.54 ; C46.1@6359,4632 6359,4752 ; 6359,4819 6359,4817.57 ; v3(6467,4783) 6466.43,4783.57 6393,4783.57 ; D11.2@6638.4,4975.13 D12.2@6638.4,4783.57 6677.57,4783.57 v3(6678,4784) ; 6359,4673.21 ccw(c6395.21,4673.21) 6369.61,4647.61 cw(c6395.21,4673.21) 6359,4673.21 ; 6359,4673.21 cw(c6322.79,4673.21) 6348.39,4647.61 ccw(c6322.79,4673.21) 6359,4673.21 ; 6359,4752 6359,4783 ; 6359,4752 6390.57,4783.57 ; 6359,4783 6359,4817.57 ; 6359,4783 6359.57,4783.57 6390.57,4783.57 ; 6359,4817.57 6393,4783.57 ; 6390.57,4783.57 6393,4783.57
  Bottom Layer w20: v3(6467,4783) 6677,4783 v3(6678,4784) 6708,4754 v7(6708,4722)
UTXD: R76.1 U22.W1 | length 457.1
  Top Layer w15: v1(6817.65,4075.69) U22.W1@6837.34,4056
  Top Layer w20: v7(6663,4267) R76.1@6663,4312 ; 6663,4291.69 ccw(c6643.69,4291.69) 6657.34,4305.34 cw(c6643.69,4291.69) 6663,4291.69 ; 6663,4291.69 cw(c6682.31,4291.69) 6668.66,4305.34 ccw(c6682.31,4291.69) 6663,4291.69
  Mid-Layer 2 w12: v7(6663,4267) 6663,4246 6817.65,4091.35 v1(6817.65,4075.69) ; v7@6658.76,4262.76 cw(c6648.51,4252.51) 6663,4252.51 ; v7@6658.76,4262.76 cw(c6648.51,4252.51) 6663,4252.51 ; v7@6658.76,4262.76 cw(c6648.51,4252.51) 6663,4252.51 ; 6663,4252.51 cw(c6677.49,4252.51) v7@6667.24,4262.76 ; 6663,4252.51 cw(c6677.49,4252.51) v7@6667.24,4262.76 ; 6663,4252.51 cw(c6677.49,4252.51) v7@6667.24,4262.76
VCC: 
VCC1V2: C56.1 C57.1 C59.2 C75.1 C142.2 C145.2 C146.2 C153.2 C154.2 C156.2 C163.1 C164.2 C165.2 C166.2 C167.2 C172.2 C173.2 C174.2 C175.2 L28.1 U22.J8 U22.J10 U22.J12 U22.J14 U22.K9 U22.K11 U22.K13 U22.L10 U22.L12 U22.L14 U22.M9 U22.M11 U22.M13 U22.N10 U22.N12 U22.N14 U22.P9 U22.P11 U22.P13 U22.R14 U26.2 | length 3762.3
  Top Layer w12: U26.2@7826,4564.41 7780.59,4564.41 7769,4576 7769,4622 7783,4636 7912,4636 7931,4655 C75.1@7931,4698 ; 7931,4669.03 ccw(c7902.03,4669.03) 7922.51,4689.51 cw(c7902.03,4669.03) 7931,4669.03 ; 7931,4669.03 cw(c7959.97,4669.03) 7939.49,4689.51 ccw(c7959.97,4669.03) 7931,4669.03
  Top Layer w15: v1(6975.13,3524.5) U22.R14@6994.82,3544.19 ; v1(7014.5,3563.87) U22.P13@7034.19,3583.56 ; v1(7014.5,3681.99) U22.P11@7034.19,3662.3 ; v1(7014.5,3760.73) U22.P9@7034.19,3741.04 ; v1(7053.87,3524.5) U22.N14@7073.56,3544.19 ; v1(7053.87,3603.24) U22.N12@7073.56,3622.93 ; v1(7053.87,3721.36) U22.N10@7073.56,3701.67 ; v1(7093.24,3563.87) U22.M13@7112.93,3583.56 ; v1(7093.24,3681.99) U22.M11@7112.93,3662.3 ; v1(7093.24,3760.73) U22.M9@7112.93,3741.04 ; U22.L14@7152.3,3544.19 v1(7171.99,3524.5) ; U22.L12@7152.3,3622.93 v1(7171.99,3603.24) ; U22.L10@7152.3,3701.67 v1(7171.99,3721.36) ; U22.K13@7191.67,3583.56 v1(7211.36,3563.87) ; U22.K11@7191.67,3662.3 v1(7211.36,3681.99) ; U22.K9@7191.67,3741.04 v1(7211.36,3760.73) ; U22.J14@7231.04,3544.19 v1(7250.73,3524.5) ; U22.J12@7231.04,3622.93 v1(7250.73,3603.24) ; U22.J10@7231.04,3701.67 v1(7250.73,3721.36) ; U22.J8@7231.04,3780.41 v1(7250.73,3800.1)
  Top Layer w30: v10@7057.39,4497.28 cw(c7080.62,4464.15) 7109.24,4492.76 ; v10(7066,4485) 7074,4493 7109,4493 ; 7066,4536 7109,4493 ; C57.1@7066,4600.8 7066,4636.33 7051,4651.33 ; C56.1@7075,4762 7075,4717.67 7051,4693.67 ; 7121.52,4493 ccw(c7121.52,4429.48) v10@7076.61,4474.39 ; C59.2@7250,4493 7109,4493 ; C75.1@7931,4698 7931,4742 v3(7912,4761) ; C57.1@7051,4648.32 ccw(c7084,4648.32) C57.1@7060.66,4624.99 ; C57.1@7051,4648.32 ccw(c7084,4648.32) C57.1@7060.66,4624.99 ; C57.1@7051,4648.32 ccw(c7084,4648.32) C57.1@7060.66,4624.99 ; C57.1@7051,4648.32 ccw(c7084,4648.32) C57.1@7060.66,4624.99 ; 7051,4651.33 cw(c7034.65,4651.33) 7035.24,4634.99 ccw(c7034.65,4651.33) 7051,4651.33 ; 7051,4651.33 7051,4693.67 ; 7051,4693.66 cw(c6972.37,4693.66) 7017.04,4628.95 ccw(c6972.37,4693.66) 7051,4693.66 ; v10@7076.61,4474.39 cw(c7121.53,4429.47) 7121.53,4493 ; v10@7076.61,4474.39 cw(c7121.53,4429.47) 7121.53,4493 ; v10@7076.61,4474.39 cw(c7121.53,4429.47) 7121.53,4493 ; v10@7078.48,4476.67 cw(c7109,4456.31) 7109,4493 ; v10@7078.48,4476.67 cw(c7109,4456.31) 7109,4493 ; v10@7078.48,4476.67 cw(c7109,4456.31) 7109,4493 ; 7109,4493 7121.53,4493 ; v3(7912,4761) cw(c7866.13,4715.13) C75.1@7931,4715.13 ; v3(7912,4761) cw(c7902.5,4734.13) 7931,4734.13 ccw(c7902.5,4734.13) v3(7912,4761) ; v3(7912,4761) cw(c7866.13,4715.13) C75.1@7931,4715.13 ; v3(7912,4761) cw(c7866.13,4715.13) C75.1@7931,4715.13 ; C75.1@7927.4,4699.5 ccw(c7905.16,4712.34) 7929.97,4718.98 cw(c7905.16,4712.34) C75.1@7927.4,4699.5
  Top Layer w60: v10(7066,4485) 7066,4536 C57.1@7066,4600.8
  Top Layer w80: L28.1@7536,4692 7536,4573 7590,4519 7644,4519 v17(7643,4518) ; 7562,4547 ccw(c7633.17,4618.16) v17(7643,4518) ; v17(7643,4518) cw(c7643,4643.54) 7554.23,4554.77 ccw(c7643,4643.54) v17(7643,4518)
  Bottom Layer w15: C146.2@6936.3,3488.98 6936.3,3514.3 6946.5,3524.5 v1(6975.13,3524.5) ; C142.2@6976.02,3760.3 6976.44,3760.73 v1(7014.5,3760.73) ; C145.2@6995.5,3544.53 7014.5,3563.53 v1(7014.5,3563.87) ; C154.2@7014.3,3641.98 7014.5,3642.19 v1(7014.5,3681.99) ; C156.2@7017.98,3487.7 7053.87,3523.59 v1(7053.87,3524.5) ; v1(7093.24,3681.99) 7093.24,3642.04 C153.2@7093.3,3641.98 ; C166.2@7132.98,3602.7 7133.53,3603.24 v1(7171.99,3603.24) ; C163.1@7133.02,3721.7 7171.64,3721.7 v1(7171.99,3721.36) ; C167.2@7161.5,3494.53 7171.99,3505.01 v1(7171.99,3524.5) ; v1(7211.36,3681.99) 7214.7,3678.64 C165.2@7214.7,3641.98 ; v1(7211.36,3760.73) C164.2@7211.36,3797.64 ; v1(7250.73,3524.5) 7251.93,3523.3 C174.2@7289.98,3523.3 ; v1(7250.73,3721.36) 7288.64,3721.36 C173.2@7289.98,3722.7 ; v1(7250.73,3800.1) 7250.93,3800.1 C172.2@7270.53,3780.5 ; v1@7251.3,3603.82 v1(7250.73,3603.24) 7289.04,3603.24 C175.2@7289.98,3602.3 ; v1(7171.99,3524.5) cw(c7133.47,3524.5) 7160.45,3497.02 ccw(c7133.47,3524.5) v1(7171.99,3524.5) ; v1@7209.7,3680.33 cw(c7197.63,3668.26) 7214.7,3668.26 ccw(c7197.63,3668.26) v1@7209.7,3680.33
VCC1V8: C227.2 C228.1 C229.1 D20.20 N5.2 N5.4 | length 3573
  Bottom Layer w10: 5929,4331 5929,4300 5943,4286 5972.32,4286 C227.2@5974.02,4287.7 5993.48,4307.16 D20.20@6013.57,4307.16 ; 5956.84,4286 ccw(c5956.84,4303.87) C227.2@5969.48,4291.23 ; C227.2@5975.02,4292.7 ccw(c5975.02,4302.36) C227.2@5981.85,4295.53 ; C227.2@5980.02,4287.7 cw(c5994.5,4287.7) 5984.26,4297.94 ; 5987.05,4300.74 cw(c6002.75,4285.04) 6002.75,4307.24 ccw(c6000.57,4290.79) 5988.84,4302.52
  Bottom Layer w30: 5929,4331 5929,4553 5975,4599 6184,4599 6424.02,4358.98 6679.25,4358.98 6683.27,4363 7000,4363 7032,4395 7489,4395 7534.88,4440.88 C229.1@7534.88,4633 7530,4633 7520,4643 C228.1@7426,4643 ; 7470.92,4643 cw(c7470.92,4569.03) C229.1@7523.22,4621.34 ; C229.1@7523.22,4599.68 cw(c7495.06,4571.52) 7534.88,4571.52 cw(c7574.71,4571.52) C229.1@7546.55,4599.68
  Bottom Layer w40: N5.4@7502.44,4750.64 cw(c7431.07,4679.28) C229.1@7532,4679.28 ; C229.1@7506.93,4649.06 cw(c7547.2,4657.12) 7518.16,4686.16 ; N5.4@7507.81,4746.16 cw(c7475.82,4699.98) 7532,4699.98 ; C229.1@7532,4635.88 7532,4700 ; 7532,4688.67 cw(c7619.65,4688.67) N5.4@7557.67,4750.64 ; 7532,4689.37 ccw(c7569.59,4689.37) C229.1@7543.01,4662.78 ; N5.4@7543.38,4805.88 ccw(c7476.71,4872.55) 7571,4872.55 ccw(c7665.29,4872.55) N5.4@7598.62,4805.88 ; C229.1@7546.15,4656.91 cw(c7635.25,4674.75) N5.4@7571,4739 ; N5.4@7554.78,4748.03 ccw(c7594.06,4699.98) 7532,4699.98 ; N5.2@7571,5026.29 N5.4@7571,4778.26 N5.4@7571,4739 ; 7532,4700 N5.4@7571,4739